# Altium PCB lv_1.PcbDoc
Units mil, origin at the board's own origin, x right, y up, seen from the top; angles counter-clockwise.
Board outline 3272.6 x 2401.85 mil, 2 copper layers (Top Layer, Bottom Layer); 74 components, 41 nets, 232 pads, 585 vias.
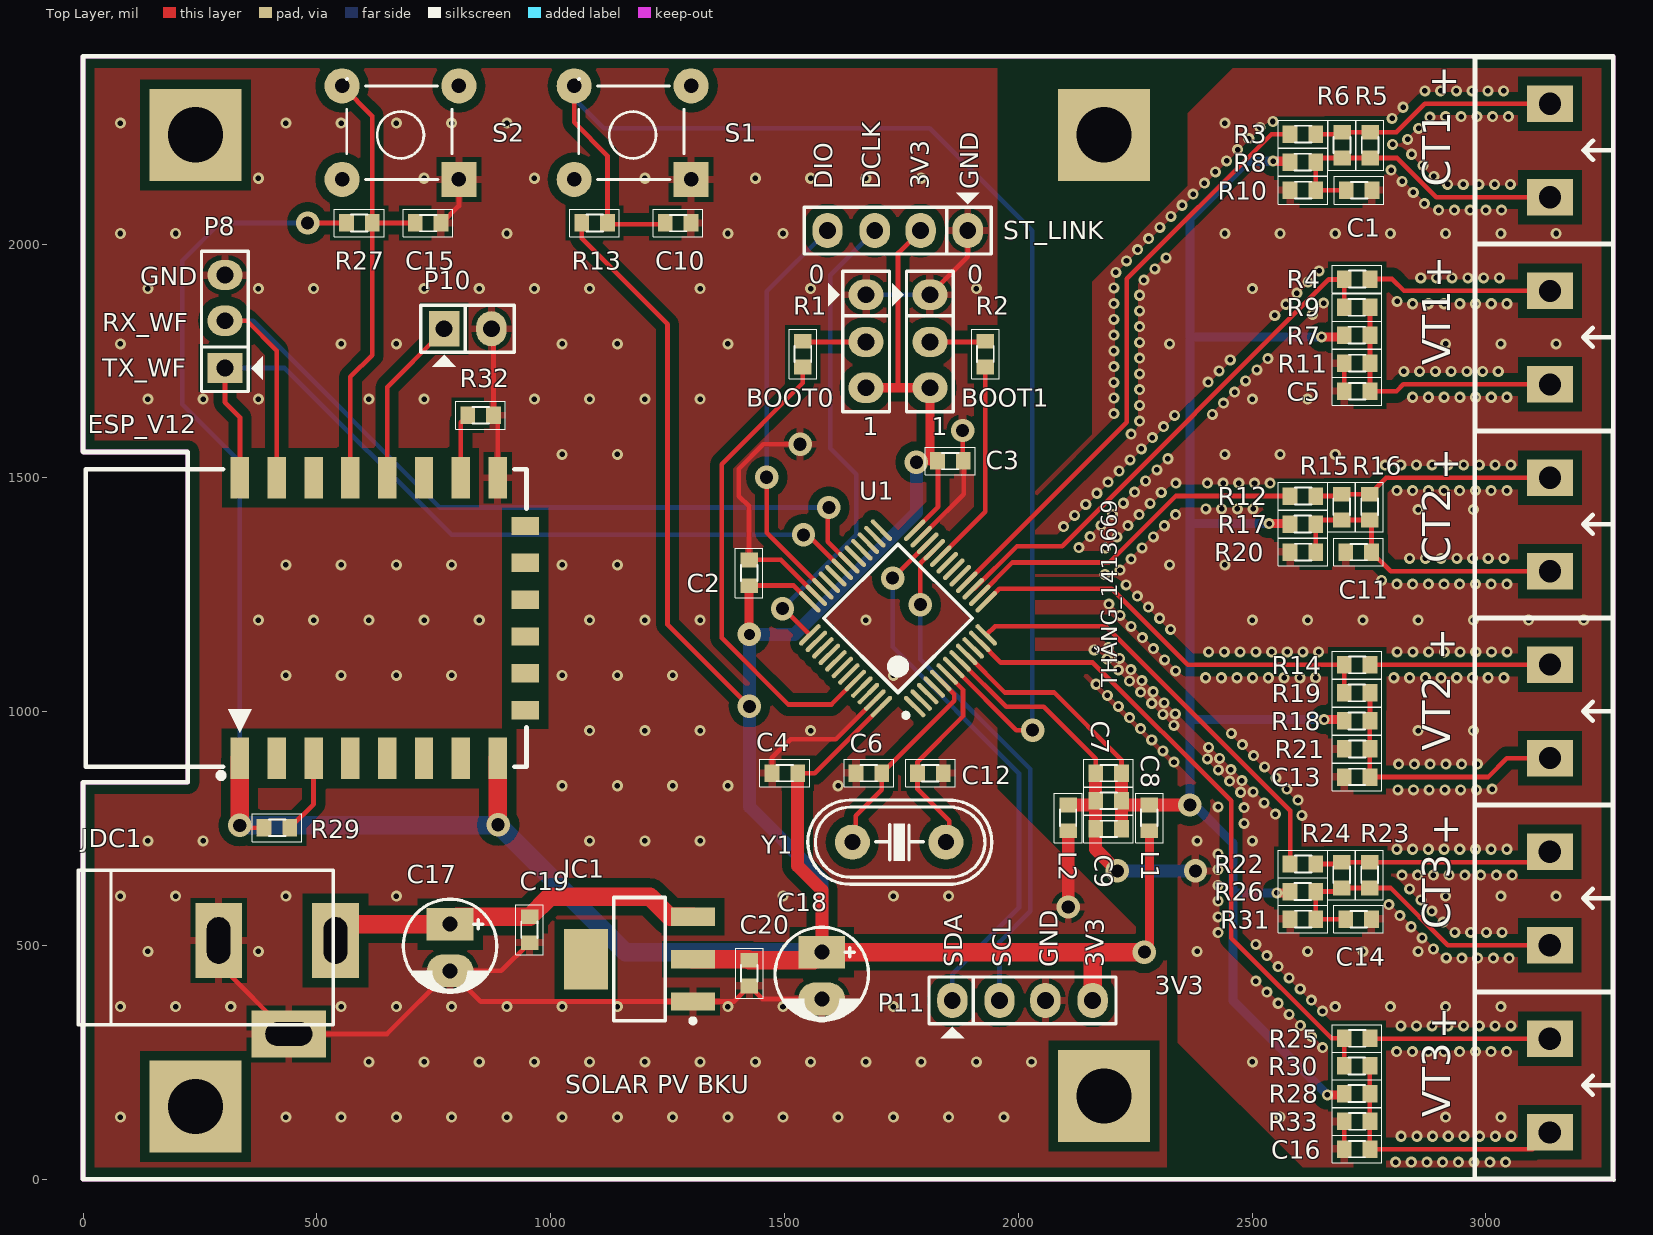
[diagram p0: Top Layer view]
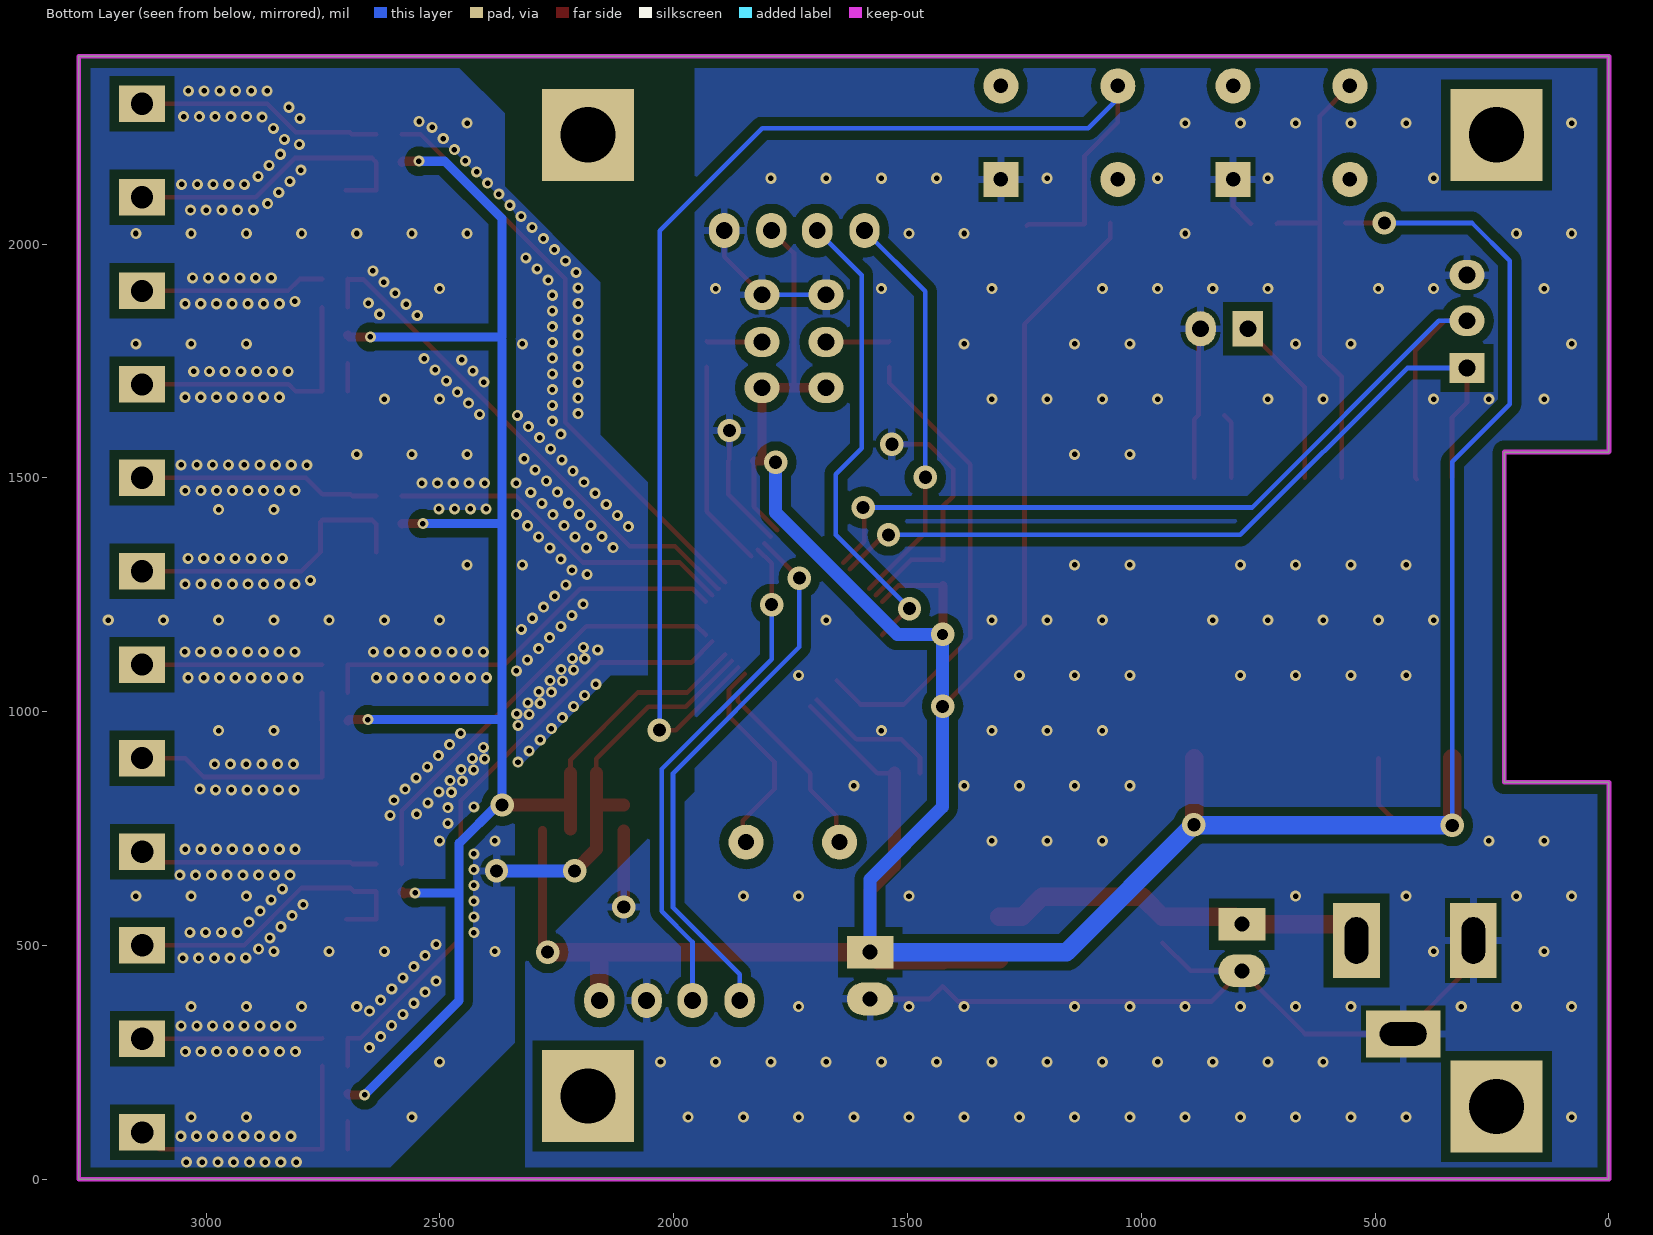
[diagram p1: Bottom Layer view, seen from below]
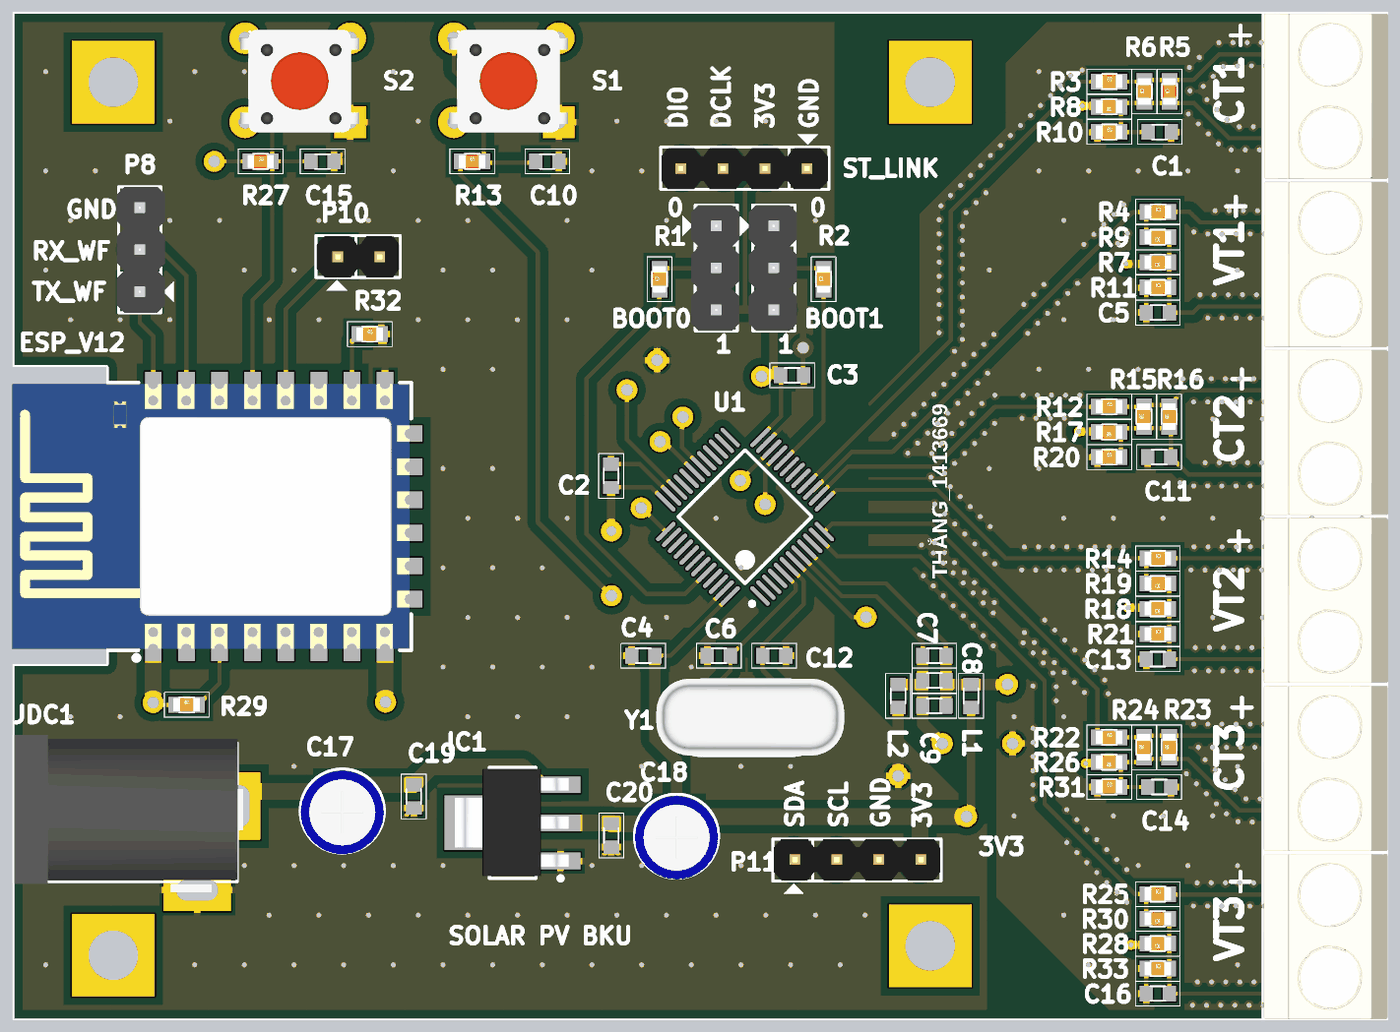
[diagram p2: 3D render of the assembled board from above, using the file's embedded part models]

## Layer stack, top to bottom
Top Solder: solder mask 0.4, Solder Resist, Dk 3.5
Top Layer: signal copper 1.4
Dielectric 1: dielectric 12.6, FR-4, Dk 4.8
Bottom Layer: signal copper 1.4
Bottom Solder: solder mask 0.4, Solder Resist, Dk 3.5

## Board outline
0,0 0,849 224.1,849 224.1,1555.19 0.66,1555.19 0,1555.85 0,2401.47 3272.6,2401.47 3272.6,-0.38 3272.21,0

## Design rules (kind name [scope] priority, off if disabled: settings)
Clearance [All] p1: gap=7.87 ignorepadtopadclearanceinfootprint=FALSE except(0: Arc-Hole Track-Hole SMDPad-Hole THPad-Hole Via-Hole Fill-Hole Poly-Hole Region-Hole Text-Hole; 19.68: Arc-Fill Arc-Poly Arc-Region Track-Fill Track-Poly Track-Region SMDPad-Fill SMDPad-Poly SMDPad-Region THPad-Fill THPad-Poly THPad-Region Via-Fill Via-Poly Via-Region Fill-Fill Fill-Poly Fill-Region Poly-Poly Poly-Region Region-Region)
PlaneConnect [All] p1: planeconnectstyle=Relief reliefexpansion=20 reliefentries=4 reliefconductorwidth=15.75 reliefairgap=10
PolygonConnect [All] p1: connectstyle=Relief reliefconductorwidth=15.75 reliefentries=4 polygonreliefangle="90 Angle" airgapwidth=10
RoutingVias [All] p1: holewidth=28 width=50 viastyle="Through Hole" minholewidth=28 minwidth=50 maxholewidth=28 maxwidth=50
SolderMaskExpansion [All] p1: expansion=4
Width [All] p1: maxlimit=39.37 minlimit=10 preferedwidth=10 minimp=50.000000 maximp=50.000000 favimp=50.000000
29 further rules are at their usual default settings.

## Components (designator, comment, footprint, x,y, rotation, side; value= is the part's Value field where it differs from the comment)
BOOT0 "Header 3" JP3#1 1674.5,1791.67 r270 top
BOOT1 "Header 3" JP3#1 1811.18,1791.67 r270 top
C1 "Cap Non-Pol SMD" CAP-SM-0603 2728.96,2115.2 r180 top value=100pF
C2 "Cap" CAP-SM-0603 1424.32,1296.64 r270 top value=100pF
C3 "Cap" CAP-SM-0603 1854.78,1536.11 r180 top value=100pF
C4 "Cap" CAP-SM-0603 1500.77,868.53 r0 top value=100pF
C5 "Cap Non-Pol SMD" CAP-SM-0603 2724.68,1685.2 r0 top value=100pF
C6 "Cap" CAP-SM-0603 1680.57,868.53 r0 top value=100pF
C7 "Cap" CAP-SM-0603 2193.17,868.53 r0 top value=100pF
C8 "Cap" CAP-SM-0603 2193.17,809.24 r0 top value=100pF
C9 "Cap" CAP-SM-0603 2193.18,749.1 r0 top value=100pF
C10 "Cap" CAP-SM-0603 1272.51,2045.15 r180 top value=100pF
C11 "Cap Non-Pol SMD" CAP-SM-0603 2727.96,1341.2 r0 top value=100pF
C12 "Cap" CAP-SM-0603 1812.22,868.53 r180 top value=100pF
C13 "Cap Non-Pol SMD" CAP-SM-0603 2724.58,860.2 r0 top value=100pF
C14 "Cap Non-Pol SMD" CAP-SM-0603 2727.96,556.2 r180 top value=100pF
C15 "Cap" CAP-SM-0603 737.97,2045.15 r180 top value=100pF
C16 "Cap Non-Pol SMD" CAP-SM-0603 2724.58,64.3 r0 top value=100pF
C17 "10uF" CP1/2 784.93,545.62 r270 top
C18 "10uF" CP1/2 1579.93,485.62 r270 top
C19 "Cap Non-Pol SMD" CAP-SM-0603 954.93,533.61 r90 top value=100pF
C20 "Cap Non-Pol SMD" CAP-SM-0603 1424.93,440.62 r90 top value=100pF
CT1 "Domino 2" "DOMINO 2- 5mm" 3137.6,2200.21 r270 top
CT2 "Domino 2" "DOMINO 2- 5mm" 3137.18,1400.29 r270 top
CT3 "Domino 2" "DOMINO 2- 5mm" 3136.83,600.37 r270 top
ESP_V12 "ESP_V12" ESP_12_E 335.46,885.24 r90 top
IC1 "LM1117" SOT223-4N 1189.93,470.62 r180 top value=LM317
JDC1 "Jack DC" DC-IN 414.93,410.62 r0 top value="Jac DC"
L1 "Inductor" CAP-SM-0603 2280.64,772.72 r90 top value=10mH
L2 "Inductor" CAP-SM-0603 2106.97,772.72 r90 top value=10mH
P8 "Header 3" JP3#2 303.37,1834.94 r90 top
P10 "Header 2" JP2 772.23,1818.95 r0 top
P11 "Header 4" JP4 1959.05,382.37 r0 top
R1 "RESISTOR SMD" RES-SM-0603 1539.32,1737.63 r90 top value=1K
R2 "RESISTOR SMD" RES-SM-0603 1929.66,1737.63 r90 top value=1K
R3 "RESISTOR SMD" RES-SM-0603 2582.02,2235.2 r0 top value=1K
R4 "RESISTOR SMD" RES-SM-0603 2697.68,1925.2 r0 top value=1K
R5 "RESISTOR SMD" RES-SM-0603 2752.58,2184.58 r90 top value=2R
R6 "RESISTOR SMD" RES-SM-0603 2692.58,2184.58 r90 top value=2R
R7 "RESISTOR SMD" RES-SM-0603 2751.68,1805.2 r180 top value=470K
R8 "RESISTOR SMD" RES-SM-0603 2636.02,2175.2 r180 top value=470K
R9 "RESISTOR SMD" RES-SM-0603 2751.68,1864.72 r180 top value=1K
R10 "RESISTOR SMD" RES-SM-0603 2582.02,2115.2 r0 top value=470K
R11 "RESISTOR SMD" RES-SM-0603 2697.68,1745.2 r0 top value=470K
R12 "RESISTOR SMD" RES-SM-0603 2582.02,1461.2 r0 top value=1K
R13 "RESISTOR SMD" RES-SM-0603 1066.83,2045.15 r0 top value=1K
R14 "RESISTOR SMD" RES-SM-0603 2697.68,1100.17 r0 top value=1K
R15 "RESISTOR SMD" RES-SM-0603 2691.58,1410.58 r90 top value=2R
R16 "RESISTOR SMD" RES-SM-0603 2751.58,1410.58 r90 top value=2R
R17 "RESISTOR SMD" RES-SM-0603 2636.02,1401.2 r180 top value=470K
R18 "RESISTOR SMD" RES-SM-0603 2751.58,980.2 r180 top value=470K
R19 "RESISTOR SMD" RES-SM-0603 2751.68,1040.2 r180 top value=1K
R20 "RESISTOR SMD" RES-SM-0603 2582.02,1341.2 r0 top value=470K
R21 "RESISTOR SMD" RES-SM-0603 2697.58,920.2 r0 top value=470K
R22 "RESISTOR SMD" RES-SM-0603 2582.02,674.2 r0 top value=1K
R23 "RESISTOR SMD" RES-SM-0603 2751.58,623.58 r90 top value=2R
R24 "RESISTOR SMD" RES-SM-0603 2691.58,623.58 r90 top value=2R
R25 "RESISTOR SMD" RES-SM-0603 2697.58,301.2 r0 top value=1K
R26 "RESISTOR SMD" RES-SM-0603 2636.02,615.2 r180 top value=470K
R27 "RESISTOR SMD" RES-SM-0603 563.77,2045.15 r0 top value=1K
R28 "RESISTOR SMD" RES-SM-0603 2751.58,183.2 r180 top value=470K
R29 "RESISTOR SMD" RES-SM-0603 387.69,751.71 r0 top value=1K
R30 "RESISTOR SMD" RES-SM-0603 2751.58,242.2 r180 top value=1K
R31 "RESISTOR SMD" RES-SM-0603 2582.02,556.2 r0 top value=470K
R32 "RESISTOR SMD" RES-SM-0603 823.25,1633.94 r0 top value=1K
R33 "RESISTOR SMD" RES-SM-0603 2697.58,123.81 r0 top value=470K
S1 "SW-PB" "Tact SW 4 pin" 1300.23,2138.35 r180 top
S2 "SW-PB" "Tact SW 4 pin" 803.85,2138.35 r180 top
ST_LINK "Header 4" JP4 1792.12,2028.86 r180 top
U1 "STM32F103C8T6" STM-LQFP48_L 1742.95,1199.56 r135 top
VT1 "Domino 2" "DOMINO 2- 5mm" 3137.31,1800.1 r270 top
VT2 "Domino 2" "DOMINO 2- 5mm" 3137.02,1000.5 r270 top
VT3 "Domino 2" "DOMINO 2- 5mm" 3136.83,200.38 r270 top
Y1 "XTAL" XT2 1745.35,720.86 r180 top

## Footprints (in the part's own frame and the unit in brackets; to place one, negate y for a bottom-side part, rotate by r counter-clockwise, add the part's x,y. Pads: shape width x height; smd on the part's side, far side on the other; paste and mask are expansions set on the pad)
CAP-SM-0603 [mm] "SMD Ceramic Capacitor Size 0603"
  rect 0.8x0.95 smd: 1(-0.7,0) 2(0.7,0)
  silkscreen extent -1.35,-0.75 1.35,0.75, body extent -0.85,-0.45 0.85,0.45, height 0.6
CP1/2 [mil] "Tu hoa < 22uF/16>50V"
  rect 70x100 hole 32: 1(0,0)
  oval 70x100 hole 32: 2(100,0)
  silkscreen extent -53,-100 146,100, body extent -49,-99 149,99, height 287
DC-IN [mil] "Jac DC input"
  rect 100x160 hole 50 slot 100 at 90 deg: 1(125,100) 2(-125,100)
  rect 160x100 hole 50 slot 100 at 0 deg: 3(25,-100)
  silkscreen extent -425,-80 120,250, body extent -410,-105 134,269, height 434
"DOMINO 2- 5mm" [mm]
  rect 2x2.5 hole 1.2: 1(-2.54,0) 2(2.54,0)
  silkscreen extent -5.08,-4.08 5.08,3.43, body extent -5,-4.07 5,3.43, height 10
ESP_12_E [mm] "ESP-12 Wi-Fi Module by AI-Thinker"
  rect 2.25x1 smd: 1(0.375,0) 2(0.375,-2) 3(0.375,-4) 4(0.375,-6) 5(0.375,-8) 6(0.375,-10) 7(0.375,-12) 8(0.375,-14) 15(15.625,-14) 16(15.625,-12) 17(15.625,-10) 18(15.625,-8) 19(15.625,-6) 20(15.625,-4) 21(15.625,-2) 22(15.625,0)
  rect 1x1.5 smd: 9(3,-15.5) 10(5,-15.5) 11(7,-15.5) 12(9,-15.5) 13(11,-15.5) 14(13,-15.5)
  silkscreen extent -0.7,-15.57 16.08,8.37, body extent 0,-15.49 16,8.51, height 2.75
JP2 [mil]
  rect 65x75 hole 36: 1(0,0)
  oval 65x75 hole 36: 2(101,0)
  silkscreen extent -50,-81 150,50, body extent -48,-50 148,48, height 323
JP3#1 [mil] "Jumper 3"
  oval 65x75 hole 36: 1(-100,0) 2(1,0) 3(99,0)
  silkscreen extent -150,-81 150,50, body extent -150,-60 150,55, height 355
JP3#2 [mil] "Jumper 3"
  rect 65x75 hole 36: 1(-100,0)
  oval 65x75 hole 36: 2(1,0) 3(99,0)
  silkscreen extent -150,-81 150,50, body extent -150,-60 150,55, height 355
JP4 [mil] "Jumper 4"
  oval 65x75 hole 36: 1(-100,0) 2(1,0) 3(99,0) 4(200,0)
  silkscreen extent -150,-81 250,50, body extent -148,-48 248,50, height 323
RES-SM-0603 [mm]
  rect 0.8x0.95 smd: 1(-0.014,0) 2(1.386,0)
  silkscreen extent -0.66,-0.75 2.04,0.75, body extent -0.11,-0.4 1.49,0.4, height 0.3
SOT223-4N [mm] "SOT223, 4-Leads, Body 6.5x3.5mm, Pitch 2.3mm, Lead Span 7mm, IPC Medium Density"
  rect 2.4x1 smd: 1(-2.9,2.3) 2(-2.9,0) 3(-2.9,-2.3)
  rect 2.4x3.3 smd: 4(2.9,0)
  silkscreen extent -3.03,-3.35 1.4,3.47, body extent -3.39,-3.27 3.5,3.23, height 1.72
STM-LQFP48_L [mm] "QFP, 48-Leads, Body 7x7mm, Pitch 0.5mm, IPC High Density"
  oval 1.55x0.25 smd: 1(-4.025,2.75) 2(-4.025,2.25) 3(-4.025,1.75) 4(-4.025,1.25) 5(-4.025,0.75) 6(-4.025,0.25) 7(-4.025,-0.25) 8(-4.025,-0.75) 9(-4.025,-1.25) 10(-4.025,-1.75) 11(-4.025,-2.25) 12(-4.025,-2.75) 25(4.025,-2.75) 26(4.025,-2.25) 27(4.025,-1.75) 28(4.025,-1.25) 29(4.025,-0.75) 30(4.025,-0.25) 31(4.025,0.25) 32(4.025,0.75) 33(4.025,1.25) 34(4.025,1.75) 35(4.025,2.25) 36(4.025,2.75)
  oval 0.25x1.55 smd: 13(-2.75,-4.025) 14(-2.25,-4.025) 15(-1.75,-4.025) 16(-1.25,-4.025) 17(-0.75,-4.025) 18(-0.25,-4.025) 19(0.25,-4.025) 20(0.75,-4.025) 21(1.25,-4.025) 22(1.75,-4.025) 23(2.25,-4.025) 24(2.75,-4.025) 37(2.75,4.025) 38(2.25,4.025) 39(1.75,4.025) 40(1.25,4.025) 41(0.75,4.025) 42(0.25,4.025) 43(-0.25,4.025) 44(-0.75,4.025) 45(-1.25,4.025) 46(-1.75,4.025) 47(-2.25,4.025) 48(-2.75,4.025)
  silkscreen extent -4.15,-2.85 2.85,3.55, body extent -3.5,-3.5 3.5,3.5, height 1.6
"Tact SW 4 pin" [mil] "SW button 4pin, 250 x250 mil"
  rect 75x75 hole 31: 1(0,0)
  round 75 hole 31: 2(250,-200) 3(250,0) 4(0,-200)
  silkscreen extent 15,-215 240,0, body extent -36,-220 276,24, height 276
XT2 [mil] "Footpin for Crystal 2 pin"
  round 75 hole 34: 1(-100,0) 2(100,0)
  silkscreen extent -198,-90 195,90, body extent -233,-93 213,90, height 138

## Part data
BOOT0 BOOT1 P8: "Header, 3-Pin", LatestRevisionDate=17-Jul-2002, LatestRevisionNote="Re-released for DXP Platform.", Publisher="Altium Limited"
C1 C2 C3 C4 C5 C6 C7 C8 C9 C10 C11 C12 C13 C14 C15 C16 C19 C20: "Capacitor"
  C2 C3 C4 C6 C7 C8 C9 C10 C12 C15: LatestRevisionDate=17-Jul-2002, LatestRevisionNote="Re-released for DXP Platform.", PackageDescription="Radial Cap, Thru-Hole; 2 Leads; 0.3 in Pin Spacing", PackageReference=RAD-0.3, Published=8-Jun-2000, Publisher="Altium Limited"
C17 C18: library part "Cap Pol1", "Polarized Capacitor (Radial)", LatestRevisionDate=17-Jul-2002, LatestRevisionNote="Re-released for DXP Platform.", PackageDescription="Polarized Capacitor (Radial); 2 Leads", PackageReference=RB7.6-15, Published=8-Jun-2000, Publisher="Altium Limited"
CT1 CT2 CT3 VT1 VT2 VT3: "Domino, 2-Pin", LatestRevisionDate=17-Jul-2002, LatestRevisionNote="Re-released for DXP Platform.", Publisher="Altium Limited"
ESP_V12: library part Component_1
IC1: "Available in 1.8V, 2.5V, 2.85V, 3.3V, 5V, and  Adjustable Versions"
JDC1: "Jack DC input"
P10: "Header, 2-Pin", LatestRevisionDate=17-Jul-2002, LatestRevisionNote="Re-released for DXP Platform.", Publisher="Altium Limited"
P11 ST_LINK: "Header, 4-Pin", LatestRevisionDate=17-Jul-2002, LatestRevisionNote="Re-released for DXP Platform.", Publisher="Altium Limited"
R1 R2 R3 R4 R5 R6 R7 R8 R9 R10 R11 R12 R13 R14 R15 R16 R17 R18 R19 R20 R21 R22 R23 R24 R25 R26 R27 R28 R29 R30 R31 R32 R33: "Resistor"
S1 S2: "Switch", LatestRevisionDate=17-Jul-2002, LatestRevisionNote="Re-released for DXP Platform.", PackageDescription="Switch; 2 Leads", PackageReference=SPST-2, Published=24-Mar-1999, Publisher="Altium Limited"
U1: "ARM Cortex-M3 32-bit MCU, 64 KB Flash, 20 KB Internal RAM, 37 I/Os, 48-pin LQFP, -40 to 85 degC, Tray", I/Os (High Current)=37, Operating Frequency(F) (Processor speed) (MHz)=72, Supplier Part Number 1=497-6063-ND, Supply Voltage(Vcc) min (V)=2, A/D Converter="2x12-bit (10 Channel)", ComponentLink1Description="Manufacturer URL", ComponentLink1URL=http://www.st.com/web/en/home.html, ComponentLink2Description=Datasheet, ComponentLink2URL=http://www.st.com/st-web-ui/static/active/en/resource/technical/document/datasheet/CD00161566.pdf, ComponentLink3Description="Package Specification", ComponentLink3URL=http://www.st.com/st-web-ui/static/active/en/resource/technical/document/datasheet/DM00058181.pdf, Core="ARM Cortex-M3", DatasheetVersion="Rev. 16", FLASH Size (Prog) (kB)=64, Internal RAM Size (kB)=20, Mounting Technology="Surface Mount", PackageDescription="48-Pin Low Profile Quad Flat Package, 7 x 7 mm Body, 0.5 mm Pitch", PackageReference=LQFP48, PackageVersion="Rev. 6, 06/2013", Packing=Tray, PartNumber=STM32F103C8T6, Supplier 1=Digi-Key, Supplier 2=Farnell, Supplier 3=Newark, Supplier 4=Newark, Supplier 5=Mouser, Supplier Part Number 2=1447637, Supplier Part Number 3=59M2182, Supplier Part Number 4=57P1222, Supplier Part Number 5=511-STM32F103C8T6
Y1: "Crystal Oscillator", LatestRevisionDate=17-Jul-2002, LatestRevisionNote="Re-released for DXP Platform.", PackageDescription="Crystal, Thru-Hole; 2 Leads; Body 3.1 x 8.2 mm (Dia.xH)", PackageReference=R38, Published=8-Jun-2000, Publisher="Altium Limited"
L1 L2: Code_IEC=1005, Code_JEITA=0402, LatestRevisionDate=29-May-2009, LatestRevisionNote="IPC-7351 Footprint Added.", PackageDescription="Chip Inductor", PackageReference=0402-A, Published=8-Jun-2000, Publisher="Altium Limited"

## Free pads (board coordinates)
  rect 196.85x196.85 hole 118.11: 1(240.19,155.57) 1(240.19,2233.76) 1(2183.21,178.09) 1(2183.21,2233.76)

## Via types
v1: diameter 23.62, hole 11.81, Top Layer to Bottom Layer, tented both sides, 559 vias
v2: diameter 50, hole 28, Top Layer to Bottom Layer, 18 vias
v3: diameter 23.62, hole 11.81, Top Layer to Bottom Layer, 6 vias
v4: diameter 50, hole 28, Top Layer to Bottom Layer, tented both sides, 1 vias
v5: diameter 50, hole 23.62, Top Layer to Bottom Layer, 1 vias

## Nets (pads, with @x,y where several pads share a name; then routed paths per layer and width w, separated by ;. In a path a pad name is that pad's centre, name@x,y a point inside that pad or via, vN(x,y) a via of type N, cw(c..) or ccw(c..) an arc to the next point about the centre after c; other vN are vias at no path point)
3V3: BOOT0.3 BOOT1.3 C2.2 C3.2 C4.2 C18.1 C20.2 ESP_V12.1 ESP_V12.8 IC1.2 L1.1 P11.4 R13.1 R27.1 R29.1 ST_LINK.2 U1.24 U1.36 U1.48 | length 8906.4
  Top Layer w10: v2(335.05,756.77) 340.1,751.71 R29.1 ; v2(480.26,2045.15) R27.1 ; R13.1 1066.27,2012.14 1250.05,1828.37 1250.05,1186.37 v2(1425.05,1011.37) ; C20.2@1422.49,470.62 C20.2 ; v5@1424.32,1166.09 v5(1425.05,1165.37) ; C2.2@1425.48,1269.64 1519.76,1269.64 U1.36 ; C4.2 1565.04,868.53 U1.48 ; 1743.05,1692.67 1743.05,1980.79 ST_LINK.2 ; U1.24 1828.51,1438.23 C3.2@1828.51,1536.11 ; v2(2269.8,485.62) v2@2280.64,496.45
  Top Layer w19.68: v5@1424.32,1166.09 C2.2 ; BOOT0.3 1743.05,1692.67 BOOT1.3 1811.18,1536.11 C3.2 ; v2@2280.64,496.45 L1.1
  Top Layer w27.56: C4.2 1528.33,670.09 1579.93,618.48 C18.1
  Top Layer w39.37: v2(335.05,756.77) ESP_V12.1 ; ESP_V12.8 886.64,759.27 v2(887.78,758.13) ; IC1.2 C20.2@1422.49,470.62 ; C20.2 1562.49,468.18 C18.1 2156.05,485.62 ; P11.4 2159.05,482.62 2156.05,485.62 ; v2(2269.8,485.62) 2156.05,485.62
  Bottom Layer w10: v2(335.05,756.77) 335.05,1534.37 212.05,1657.37 212.05,1964.37 292.84,2045.15 v2(480.26,2045.15)
  Bottom Layer w27.56: C18.1 1579.93,641.48 1425.05,796.37 v2(1425.05,1011.37) v5(1425.05,1165.37) 1522.05,1165.37 1782.05,1425.37 v2(1782.05,1533.37)
  Bottom Layer w39.37: v2(335.05,756.77) 886.42,756.77 v2(887.78,758.13) 1160.3,485.62 C18.1
5V: C17.1 C19.2 IC1.3 JDC1.1 | length 820.8
  Top Layer w10: JDC1.1 JDC1.1@574.93,545.62 ; C17.1 C17.1@800.48,561.17
  Top Layer w39.37: JDC1.1@574.93,545.62 C17.1 ; C17.1@800.48,561.17 C19.2 998.07,604.3 1212.11,604.3 1255.25,561.17 IC1.3
A1: R25.1 R30.2 U1.11 | length 1361.8
  Top Layer w10: U1.11 1962.79,1105 2159.45,1105 2455.33,809.12 2455.33,515.83 2669.96,301.2 R25.1 R30.2
A2: R22.1 U1.12 | length 935.5
  Top Layer w10: U1.12 1950.5,1183 2187,1183 2581.46,788.54 R22.1
A3: R14.1 R19.2 U1.13 | length 904.6
  Top Layer w10: U1.13 1959.51,1263 2200,1263 2362.83,1100.17 R14.1 R19.2
A4: R12.1 U1.14 | length 751.7
  Top Layer w10: U1.14 1987.67,1319 2195,1319 2337.2,1461.2 R12.1
A5: R4.1 R9.2 U1.15 | length 1126.8
  Top Layer w10: U1.15 1906.28,1262.89 1997.39,1354 2094.17,1354 2664.55,1924.38 R4.1@2696.03,1924.38 ; R9.2 R4.1
A6: R3.1 U1.16 | length 1268.2
  Top Layer w10: U1.16 2232,1619.01 2232,1925.55 2541.65,2235.2 R3.1
A7: U1.17
BOOT0: R1.1 U1.44 | length 1017.5
  Top Layer w10: R1.1 1539.32,1702.94 1365.81,1529.43 1365.81,1157.61 1508.07,1015.34 1600.49,1015.34 U1.44
BOOT1: R2.1 U1.20 | length 444.2
  Top Layer w10: U1.20 1929.66,1428.03 R2.1
BUT_CONF: C15.2 ESP_V12.19 R27.2 S2.2 | length 976.9
  Top Layer w10: S2.2 618.33,2273.86 R27.2 ; ESP_V12.19 571.68,1715.92 618.33,1762.57 R27.2 ; C15.2@710.41,2043.21 708.47,2045.15 R27.2
DCLK: ST_LINK.3 U1.37 | length 1018.1
  Top Layer w10: v2(1495.79,1220.21) 1498.2,1220.21 U1.37
  Bottom Layer w10: v2(1495.79,1220.21) 1653.5,1377.92 1653.5,1507.92 1598.05,1563.37 1598.05,1933.79 ST_LINK.3
DIO: ST_LINK.4 U1.34 | length 869.6
  Top Layer w10: v2(1462.05,1501.37) 1462.05,1383.03 U1.34
  Bottom Layer w10: v2(1462.05,1501.37) 1462.05,1898.79 ST_LINK.4
GND: BOOT0.1 BOOT1.1 C2.1 C3.1 C4.1 C6.1 C10.1 C12.1 C15.1 C17.2 C18.2 C19.1 C20.1 ESP_V12.15 IC1.1 JDC1.2 JDC1.3 L2.1 P8.3 P10.2 P11.3 R32.2 S1.1 S2.1 ST_LINK.1 U1.23 U1.35 U1.47 | length 3704.8
  Top Layer w10: JDC1.2 289.93,460.62 JDC1.3 649.93,310.62 C17.2 ; C15.1@765.53,2043.21 803.85,2081.53 S2.1 ; P10.2@881.8,1810.38 877.81,1806.38 R32.2 886.64,1625.1 ESP_V12.15 ; C19.1 894.5,445.62 C17.2 ; C2.1 C2.1@1424.32,1324.76 ; C4.1 1473.21,901.09 1513.06,940.94 1609.6,940.94 U1.47 ; v2(1533.6,1572) 1455,1572 1402,1519 1402,1461.18 1424.32,1438.85 C2.1@1424.32,1324.76 ; U1.35 1492.48,1324.76 C2.1@1424.32,1324.76 ; C18.2 1452.37,385.62 C20.1 1391.94,380.07 IC1.1 850.48,380.07 C17.2 ; U1.23 1883.52,1465.4 1883.52,1536.11 1881.02,1538.61 v4(1881.02,1601.37) ; BOOT1.1 1892.12,1972.6 ST_LINK.1
  Top Layer w27.56: v2(2106.97,582.29) L2.1
  Bottom Layer w10: BOOT0.1 BOOT1.1
  other v1: 79.59,132.9 433.92,132.9 552.03,132.9 670.14,132.9 788.26,132.9 906.37,132.9 1024.48,132.9 1142.59,132.9 1260.7,132.9 1378.81,132.9 1496.92,132.9 1615.03,132.9 1733.14,132.9 1851.25,132.9 1969.36,132.9 611.09,251.01 729.2,251.01 847.31,251.01 965.42,251.01 1083.53,251.01 1201.64,251.01 1319.75,251.01 1437.86,251.01 1555.97,251.01 1674.08,251.01 1792.19,251.01 1910.3,251.01 2028.41,251.01 79.59,369.12 197.7,369.12 315.81,369.12 552.03,369.12 670.14,369.12 788.26,369.12 906.37,369.12 1024.48,369.12 1142.59,369.12 1378.81,369.12 1496.92,369.12 1733.14,369.12 138.65,487.23 374.87,487.23 79.59,605.34 197.7,605.34 433.92,605.34 670.14,605.34 1496.92,605.34 1733.14,605.34 1851.25,605.34 138.65,723.45 256.76,723.45 1083.53,723.45 1201.64,723.45 1319.75,723.45 1024.48,841.56 1142.59,841.56 1260.7,841.56 1378.81,841.56 1615.03,841.56 1083.53,959.67 1201.64,959.67 1319.75,959.67 1555.97,959.67 433.92,1077.78 552.03,1077.78 670.14,1077.78 788.26,1077.78 1024.48,1077.78 1142.59,1077.78 1260.7,1077.78 1733.14,1077.78 374.87,1195.89 492.98,1195.89 611.09,1195.89 729.2,1195.89 847.31,1195.89 1083.53,1195.89 1201.64,1195.89 1319.75,1195.89 1674.08,1195.89 433.92,1314 552.03,1314 670.14,1314 788.26,1314 1024.48,1314 1142.59,1314 1024.48,1550.22 1142.59,1550.22 138.65,1668.33 256.76,1668.33 374.87,1668.33 611.09,1668.33 729.2,1668.33 965.42,1668.33 1083.53,1668.33 1201.64,1668.33 1319.75,1668.33 79.59,1786.44 552.03,1786.44 670.14,1786.44 1024.48,1786.44 1142.59,1786.44 1378.81,1786.44 138.65,1904.55 374.87,1904.55 492.98,1904.55 729.2,1904.55 847.31,1904.55 965.42,1904.55 1083.53,1904.55 1319.75,1904.55 1555.97,1904.55 1910.3,1904.55 79.59,2022.66 197.7,2022.66 906.37,2022.66 1378.81,2022.66 1496.92,2022.66 374.87,2140.77 729.2,2140.77 965.42,2140.77 1201.64,2140.77 1437.86,2140.77 1555.97,2140.77 1674.08,2140.77 1792.19,2140.77 79.59,2258.88 433.92,2258.88 552.03,2258.88 670.14,2258.88 788.26,2258.88 906.37,2258.88
NetBOOT0_2: BOOT0.2 R1.2 | length 135.8
  Top Layer w10: R1.2 1540.85,1790.67 BOOT0.2
NetBOOT1_2: BOOT1.2 R2.2 | length 119.1
  Top Layer w10: BOOT1.2 1928.13,1790.67 R2.2
NetC1_2: C1.2 CT1.2 R5.1 R6.1 R8.1 R10.2 | length 664.2
  Top Layer w10: C1.2 R10.2 R8.1 2645.4,2184.02 R6.1 R5.1 2810.48,2184.02 2894.29,2100.21 CT1.2
NetC5_2: C5.2 R7.1 R9.1 R11.2 VT1.2 | length 570.8
  Top Layer w10: R9.1 R7.1 R11.2 C5.2 2808.99,1685.2 2823.89,1700.1 VT1.2
NetC6_2: C6.2 U1.5 Y1.2 | length 445.1
  Top Layer w10: Y1.2@1652.29,720.91 1652.29,777.59 1708.13,833.44 C6.2 1863.23,1023.63 1863.23,1037.52 U1.5
NetC10_2: C10.2 R13.2 S1.2 U1.7 | length 2867.1
  Top Layer w10: S1.2 1050.23,2260.37 1121.39,2189.2 R13.2 1121.39,2042.21 1242.01,2042.21 C10.2@1244.95,2039.27 ; U1.7 1995.9,960.54 v2(2030.73,960.54)
  Bottom Layer w10: S1.2 1050.23,2310.98 1113.56,2247.65 1810.91,2247.65 2030.1,2028.46 2030.1,961.16 v2(2030.73,960.54)
NetC11_2: C11.2 CT2.2 R15.1 R16.1 R17.1 R20.2 | length 647.7
  Top Layer w10: R20.2 R17.1 2645.4,1410.02 R15.1 R16.1 2755.52,1406.08 C11.2 2796.42,1300.29 CT2.2
NetC12_2: C12.2 U1.6 Y1.1 | length 442
  Top Layer w10: U1.6 1881.9,1046.69 1881.9,990.25 1784.66,893 C12.2 1784.66,834.46 1852.29,766.83 Y1.1@1852.29,720.91
NetC13_2: C13.2 R18.1 R19.1 R21.2 VT2.2 | length 581.6
  Top Layer w10: R19.1 2752.24,980.3 R18.1 R21.2 C13.2 3004.67,860.2 3044.98,900.5 VT2.2
NetC14_2: C14.2 CT3.2 R23.1 R24.1 R26.1 R31.2 | length 677.1
  Top Layer w10: C14.2 R31.2 R26.1 2683.76,615.2 R24.1 R23.1 2796.17,623.02 2918.81,500.37 CT3.2
NetC16_2: C16.2 R28.1 R30.1 R33.2 VT3.2 | length 577.5
  Top Layer w10: R30.1 R28.1 R33.2 C16.2 3100.75,64.3 VT3.2
NetCT1_1: CT1.1 R3.2 R5.2 R6.2 | length 527.9
  Top Layer w10: R3.2 2688.64,2235.2 R6.2 R5.2 2808.84,2239.13 2869.91,2300.21 CT1.1
NetCT2_1: CT2.1 R12.2 R15.2 R16.2 | length 516.8
  Top Layer w10: R12.2 2687.64,1461.2 R15.2 R16.2 2786.74,1500.29 CT2.1
NetCT3_1: CT3.1 R22.2 R23.2 R24.2 | length 511.1
  Top Layer w10: R22.2 2687.64,674.2 R24.2 R23.2 3114.59,678.13 CT3.1
NetESP_V12_3: ESP_V12.3 R29.2 | length 169.3
  Top Layer w10: R29.2 492.94,802.41 ESP_V12.3
NetESP_V12_16: ESP_V12.16 R32.1 | length 139.7
  Top Layer w10: ESP_V12.16 807.9,1619.15 R32.1
NetESP_V12_18: ESP_V12.18 P10.1 | length 365.6
  Top Layer w10: ESP_V12.18 650.42,1694.27 761.72,1805.57 P10.1@776,1805.57
NetR4_2: R4.2 VT1.1 | length 395.5
  Top Layer w10: R4.2 2799.93,1925.2 2825.03,1900.1 VT1.1
NetR14_2: R14.2 VT2.1 | length 384.9
  Top Layer w10: R14.2 3136.7,1100.17 VT2.1
NetR25_2: R25.2 VT3.1 | length 385
  Top Layer w10: R25.2 2752.95,300.38 VT3.1
RX_MCU: ESP_V12.22 P8.1 U1.31 | length 1749.6
  Top Layer w10: P8.1 303.37,1661.46 335.46,1629.36 ESP_V12.22 ; v2(1540.79,1378.13) 1540.79,1373.02 1555.58,1373.02 U1.31
  Bottom Layer w10: P8.1 431.55,1734.94 788.35,1378.13 v2(1540.79,1378.13)
SCL: P11.2 U1.21 | length 1100.9
  Top Layer w10: v2(1790.77,1228.84) 1790.77,1316.97 U1.21
  Bottom Layer w10: v2(1790.77,1228.84) 1790.77,1112.45 2025.88,877.33 2025.88,573.2 1960.05,507.37 P11.2
SDA: P11.1 U1.22 | length 1179.8
  Top Layer w10: v2(1731.51,1285.55) U1.22
  Bottom Layer w10: v2(1731.51,1285.55) 1731.51,1138.29 2001.58,868.22 2001.58,580.89 1859.05,438.37 P11.1
TX_MCU: ESP_V12.21 P8.2 U1.30 | length 2008.2
  Top Layer w10: P8.2 350.56,1835.94 414.2,1772.29 ESP_V12.21 ESP_V12.21@411.06,1497.26 ; v2(1594.91,1436.64) 1592.7,1434.44 1592.7,1363.73 U1.30
  Bottom Layer w10: P8.2 363.77,1835.94 763.07,1436.64 v2(1594.91,1436.64)
VDDA: C7.2 C8.2 C9.2 L1.2 R7.2 R8.2 R17.2 R18.2 R26.2 R28.2 U1.9 | length 4023.8
  Top Layer w10: U1.9 1971.15,1040.96 2076.97,1040.96 2220.73,897.2 C7.2 ; C8.2 C8.2@2229.7,800.28
  Top Layer w19.68: v3(2536.81,1402.13) 2580.53,1402.13 R17.2 ; v3(2545.05,2177.37) 2579.29,2177.37 R8.2 ; v3(2553.12,612.37) 2574.63,612.37 2576.63,610.37 R26.2 ; v3(2649.05,1801.37) 2693.29,1801.37 R7.2 ; v3(2654.34,983.07) 2694.15,983.07 R18.2 ; v3(2661.05,180.37) 2694.19,180.37 R28.2
  Top Layer w27.56: C9.2 C8.2 C7.2 ; C8.2@2229.7,800.28 L1.2 v2(2367.14,800.28)
  Bottom Layer w19.68: 2367.14,1794.37 2367.14,1402.13 ; v3(2536.81,1402.13) 2367.14,1402.13 ; v3(2545.05,2177.37) 2490.05,2177.37 2367.14,2054.45 2367.14,1801.37 v3(2649.05,1801.37) ; v3(2553.12,612.37) 2461.05,612.37 2459.05,610.37 ; v3(2654.34,983.07) 2367.14,983.07 ; v3(2661.05,180.37) 2459.05,382.37 2459.05,610.37 ; 2367.14,983.07 2367.14,1402.13 ; 2367.14,983.07 v2(2367.14,800.28) 2377.14,800.28 2459.05,718.37 2459.05,610.37
VSSA: C1.1 C5.1 C7.1 C8.1 C9.1 C11.1 C13.1 C14.1 C16.1 L2.2 R10.1 R11.1 R20.1 R21.1 R31.1 R33.1 U1.8 | length 984.3
  Top Layer w10: U1.8 1974.09,1010.19 2054.61,1010.19 2165.61,899.19 C7.1 ; C8.1@2156.64,800.28 C8.1 ; C16.1 R33.1 ; C5.1 R11.1
  Top Layer w27.56: L2.2 C8.1@2156.64,800.28 ; C7.1 C8.1 C9.1 2165.62,705.8 v2(2212.05,659.37)
  Bottom Layer w27.56: v2(2212.05,659.37) v2(2379.05,659.37)
  other v1: 2806.95,36.65 2840.58,36.65 2874.2,36.65 2907.82,36.65 2941.44,36.65 2975.06,36.65 3008.69,36.65 3042.31,36.65 2818.83,91.95 2852.46,91.95 2886.08,91.95 2919.7,91.95 2953.32,91.95 2986.94,91.95 3020.57,91.95 3054.19,91.95 2559.91,132.9 2914.24,132.9 3032.35,132.9 2500.85,251.01 2809.41,272.73 2843.03,272.73 2876.66,272.73 2910.28,272.73 2943.9,272.73 2977.52,272.73 3011.14,272.73 3044.77,272.73 2650.86,281.34 2627.01,305.04 2603.23,328.81 2818.17,328.03 2851.79,328.03 2885.41,328.03 2919.03,328.03 2952.65,328.03 2986.28,328.03 3019.9,328.03 3053.52,328.03 2579.46,352.59 2650.75,359.5 2678.02,369.12 2796.13,369.12 2914.24,369.12 3032.35,369.12 2555.69,376.36 2626.98,383.27 2531.91,400.14 2603.21,407.05 2508.14,423.91 2579.43,430.82 2555.66,454.6 2949.02,472.72 2982.64,472.72 3016.26,472.72 3049.88,472.72 2915.4,473.4 2531.88,478.37 2382.74,487.23 2618.96,487.23 2737.07,487.23 2855.18,487.23 2887.67,492.41 2508.11,502.15 2863.9,516.18 2427.68,527.59 2934.11,528.02 2967.74,528.02 3001.36,528.02 3034.98,528.02 2840.12,539.96 2908.49,549.79 2427.68,561.21 2816.35,563.73 2884.72,573.57 2792.57,587.51 2427.68,594.84 2860.94,597.34 2914.24,605.34 3032.35,605.34 3150.46,605.34 2837.17,621.12 2427.68,628.46 2820.8,650.48 2854.42,650.48 2888.04,650.48 2921.66,650.48 2955.28,650.48 2988.91,650.48 3022.53,650.48 3056.15,650.48 2427.68,662.08 2427.68,695.7 2809.84,705.78 2843.46,705.78 2877.09,705.78 2910.71,705.78 2944.33,705.78 2977.95,705.78 3011.57,705.78 3045.2,705.78 2382.74,723.45 2500.85,723.45 2482.98,761.25 2606.64,778.14 2549.81,781.08 2482.98,794.87 2427.68,796.57 2526.04,804.86 2598.37,810.73 2475.55,827.66 2502.27,828.63 2811.74,832.55 2845.37,832.55 2878.99,832.55 2912.61,832.55 2946.23,832.55 2979.85,832.55 2574.6,834.51 3013.43,834.34 2451.95,851.6 2478.49,852.41 2550.82,858.28 2428.17,875.38 2454.72,876.18 2527.05,882.05 2813.78,887.85 2847.4,887.85 2881.02,887.85 2914.65,887.85 2948.27,887.85 2981.89,887.85 2333.13,892.21 2404.4,899.15 2430.94,899.95 2503.28,905.83 2309.36,915.98 2407.17,923.73 2479.5,929.6 2285.59,939.76 2455.73,953.38 2855.18,959.67 2973.29,959.67 2261.81,963.53 2333.07,970.47 2238.04,987.3 2309.3,994.25 2335.84,995.05 2214.26,1011.08 2285.53,1018.02 2312.07,1018.83 2190.49,1034.85 2261.75,1041.8 2288.3,1042.6 2166.71,1058.63 2237.98,1065.57 2264.52,1066.37 2400.64,1072.52 2434.26,1072.52 2467.89,1072.52 2501.51,1072.52 2535.13,1072.52 2568.75,1072.52 2602.37,1072.52 2636,1072.52 2803.36,1072.52 2836.98,1072.52 2870.6,1072.52 2904.22,1072.52 2937.84,1072.52 2971.47,1072.52 3005.09,1072.52 3038.71,1072.52 2336.75,1087.15 2214.2,1089.35 2240.75,1090.15 2312.97,1110.92 2190.43,1113.12 2216.97,1113.92 2407.24,1127.82 2440.87,1127.82 2474.49,1127.82 2508.11,1127.82 2541.73,1127.82 2575.35,1127.82 2608.98,1127.82 2642.6,1127.82 2810.45,1127.82 2844.07,1127.82 2877.69,1127.82 2911.31,1127.82 2944.93,1127.82 2978.56,1127.82 3012.18,1127.82 3045.8,1127.82 2162.62,1132.02 2289.2,1134.7 2193.2,1137.7 2265.42,1158.47 2326.08,1176.02 2241.65,1182.25 2500.85,1195.89 2618.96,1195.89 2737.07,1195.89 2855.18,1195.89 2973.29,1195.89 3091.4,1195.89 3209.51,1195.89 2302.31,1199.8 2217.88,1206.02 2278.53,1223.57 2194.1,1229.8 2254.76,1247.35 2230.98,1271.12 2809.76,1272.64 2843.38,1272.64 2877,1272.64 2910.63,1272.64 2944.25,1272.64 2977.87,1272.64 3011.49,1272.64 3045.11,1272.64 2777.09,1280.59 2185.25,1293.55 2217.65,1302.55 2323.69,1314 2441.8,1314 2241.43,1326.32 2837.13,1327.94 2870.75,1327.94 2904.37,1327.94 2937.99,1327.94 2971.62,1327.94 3005.24,1327.94 3038.86,1327.94 2129.94,1350.67 2187.05,1350.16 2265.2,1350.1 2153.72,1374.45 2210.83,1373.93 2288.97,1373.87 2096.88,1395.82 2234.6,1397.7 2312.75,1397.64 2177.49,1398.22 2120.66,1419.59 2258.38,1421.48 2336.52,1421.42 2201.27,1421.99 2855.18,1432.11 2973.29,1432.11 2401.5,1433.55 2435.13,1433.55 2468.75,1433.55 2502.37,1433.55 2144.43,1443.37 2225.04,1445.77 2282.15,1445.25 2168.21,1467.14 2248.81,1469.54 2305.92,1469.03 2809.76,1472.64 2843.38,1472.64 2877,1472.64 2910.63,1472.64 2944.25,1472.64 2977.87,1472.64 3011.49,1472.64 3045.11,1472.64 2337.2,1488.85 2404.44,1488.85 2438.06,1488.85 2471.69,1488.85 2505.31,1488.85 2538.93,1488.85 2191.98,1490.91 2272.59,1493.32 2215.75,1514.69 2296.36,1517.09 2784.53,1527.5 2818.15,1527.94 2851.77,1527.94 2885.39,1527.94 2919.01,1527.94 2952.64,1527.94 2986.26,1527.94 3019.88,1527.94 3053.5,1527.94 2239.53,1538.46 2320.14,1540.87 2441.8,1550.22 2559.91,1550.22 2678.02,1550.22 2263.3,1562.24 2287.08,1586.01 2241.35,1593.4 2310.85,1609.79 2259.65,1621.61 2334.63,1633.56 2415.24,1635.96 2204.35,1637.2 2259.65,1655.23 2439.01,1659.74 2500.85,1668.33 2618.96,1668.33 2204.35,1670.83 2843.52,1672.45 2877.14,1672.45 2910.76,1672.45 2944.38,1672.45 2978,1672.45 3011.63,1672.45 3045.25,1672.45 2462.78,1683.51 2259.65,1688.85 2204.35,1704.45 2405.95,1704.88 2486.56,1707.29 2259.65,1722.47 2824.95,1727.75 2858.57,1727.75 2892.19,1727.75 2925.81,1727.75 2959.43,1727.75 2993.05,1727.75 3026.68,1727.75 2429.72,1728.66 2510.33,1731.06 2204.35,1738.07 2453.5,1752.43 2534.11,1754.83 2259.65,1756.1 2204.35,1771.69 2323.69,1786.44 2914.24,1786.44 3032.35,1786.44 3150.46,1786.44 2259.65,1789.72 2204.35,1805.31 2259.65,1823.34 2204.35,1838.94 2548.59,1847.53 2629.2,1849.93 2259.65,1856.96 2572.37,1871.3 2204.35,1872.56 2843.52,1872.45 2877.14,1872.45 2910.76,1872.45 2944.38,1872.45 2978,1872.45 3011.63,1872.45 3045.25,1872.45 2652.98,1873.71 2810.25,1877.36 2259.65,1890.58 2596.14,1895.08 2500.85,1904.55 2204.35,1906.18 2619.92,1918.85 2268.56,1923 2860.92,1927.75 2894.54,1927.75 2928.16,1927.75 2961.78,1927.75 2995.41,1927.75 3029.03,1927.75 2208.72,1939.52 2643.69,1942.63 2292.33,1946.78 2231.55,1964.2 2316.11,1970.55 2255.32,1987.97 2279.1,2011.75 2441.8,2022.66 2559.91,2022.66 2678.02,2022.66 2796.13,2022.66 2914.24,2022.66 3032.35,2022.66 3150.46,2022.66 2302.87,2035.52 2326.64,2059.3 2899.09,2072.56 2932.72,2072.56 2966.34,2072.56 2999.96,2072.56 3033.58,2072.56 2350.42,2083.07 2868.62,2086.77 2374.19,2106.85 2844.85,2110.54 2918.18,2127.86 2951.8,2127.86 2985.42,2127.86 3019.04,2127.86 3052.67,2127.86 2397.97,2130.62 2821.08,2134.32 2889.01,2144.59 2421.74,2154.39 2797.3,2158.09 2865.24,2168.36 2445.52,2178.17 2841.47,2192.14 2469.29,2201.94 2800.81,2213.08 2832.66,2223.85 2493.06,2225.72 2856.43,2247.63 2516.84,2249.49 2441.8,2258.88 2544.82,2262.22 2799.54,2268.94 2880.21,2271.4 2913.81,2272.56 2947.43,2272.56 2981.05,2272.56 3014.68,2272.56 3048.3,2272.56 2823.32,2292.72 2869.91,2327.86 2903.53,2327.86 2937.15,2327.86 2970.78,2327.86 3004.4,2327.86 3038.02,2327.86
pads on no net: ESP_V12.2 ESP_V12.4 ESP_V12.5 ESP_V12.6 ESP_V12.7 ESP_V12.9 ESP_V12.10 ESP_V12.11 ESP_V12.12 ESP_V12.13 ESP_V12.14 ESP_V12.17 ESP_V12.20 IC1.4 S1.3 S1.4 S2.3 S2.4 U1.1 U1.2 U1.3 U1.4 U1.10 U1.18 U1.19 U1.25 U1.26 U1.27 U1.28 U1.29 U1.32 U1.33 U1.38 U1.39 U1.40 U1.41 U1.42 U1.43 U1.45 U1.46

## Polygon pours and split planes (outlines as drawn)
VSSA on Top Layer "Top Layer-VSSA" (solid, pour order 2): 3272.05,2397.37 3268.05,2401.37 2484.05,2401.37 2363.05,2280.37 2363.05,2124.37 2158.05,1919.37 2158.05,1593.37 2036.05,1471.37 2036.05,1079.37 2136.05,1079.37 2341.05,874.37 2341.05,292.37 2629.05,4.37 3272.05,4.37
GND on Top Layer "Top Layer-GND" (solid, pour order 6): 1955.05,2401.37 1955.05,835.37 2318.05,472.37 2318.05,3.37 2317.05,2.37 0.05,2.37 0.05,844.37 -2.95,847.37 230.05,847.37 230.05,1557.37 3.05,1557.37 3.05,2402.37 0.05,2405.37
no net on Top Layer "Top Layer-No Net" (solid, pour order 0): 3272.05,2397.37
VSSA on Bottom Layer "Bottom Layer-VSSA" (solid, pour order 4): 3270.86,2396.37 3266.86,2400.37 2482.86,2400.37 2361.86,2279.37 2361.86,2123.37 2156.86,1918.37 2156.86,1592.37 2034.86,1470.37 2034.86,1078.37 2134.86,1078.37 2339.86,873.37 2339.86,291.37 2627.86,3.37 3270.86,3.37
GND on Bottom Layer "Bottom Layer-GND" (solid, pour order 8): 1955.05,2401.37 1955.05,828.37 2318.05,465.37 2318.05,3.37 2317.05,2.37 0.05,2.37 0.05,844.37 -2.95,847.37 230.05,847.37 230.05,1557.37 3.05,1557.37 3.05,2402.37 0.05,2405.37

## Keep-outs
Keep-Out Layer:
  the board outline again, w10

## Silkscreen, mask and mechanical layers (free items; w line width, h text height)
Top Overlay:
  lines w10: 3272.6,-0.38 3272.6,2401.47 0,2401.47 0,1555.85 0.66,1555.19 224.1,1555.19 224.1,849 0,849 0,0 3272.21,0 3273.38,-1.17
  text "+" at 2877.32,2321.89 h60
  text "DIO" at 1602.05,2117.37 h39.37 r90
  text "DCLK" at 1705.05,2117.37 h39.37 r90
  text "3V3" at 1809.12,2117.37 h39.37 r90
  text "GND" at 1914.05,2117.37 h39.37 r90
  text "0" at 1551.62,1916.37 h39.37
  text "0" at 1890.62,1916.37 h39.37
  text "+" at 2866.41,1914.65 h60
  text "GND" at 122.05,1912.37 h39.37
  text "RX_WF" at 41.05,1813.37 h39.37
  text "TX_WF" at 41.05,1716.37 h39.37
  text "1" at 1667.05,1591.37 h39.37
  text "1" at 1815.05,1591.37 h39.37
  text "+" at 2880.95,1503.77 h60
  text "+" at 2873.68,1118.35 h60
  text "THẮNG_1413669" at 2224.05,1052.37 h59.06 r90
  text "+" at 2880.95,722.02 h60
  text "SDA" at 1880,453 h39.37 r90
  text "SCL" at 1984,453 h39.37 r90
  text "GND" at 2084,453 h39.37 r90
  text "3V3" at 2183.21,453 h39.37 r90
  text "3V3" at 2292.05,395.37 h39.37
  text "+" at 2877.32,307.51 h60
  text "SOLAR PV BKU" at 1031.05,183.37 h39.37

## Text inside footprints (layer, text, board x,y; h text height)
ESP_V12: Mechanical 13 "CUTOUT POLYGON" at 45.46,890.24 h10 r90; Mechanical 13 "ANTENNA AREA" at 25.46,890.24 h10 r90